# Altium PCB Board.PcbDoc
Units mil, origin at the board's own origin, x right, y up, seen from the top; angles counter-clockwise.
Board outline 6000 x 4000 mil, 2 copper layers (Top Layer, Bottom Layer); 2 components, 2 nets, 291 pads, 0 vias.
Unrouted connection lines stored in the file: 2.
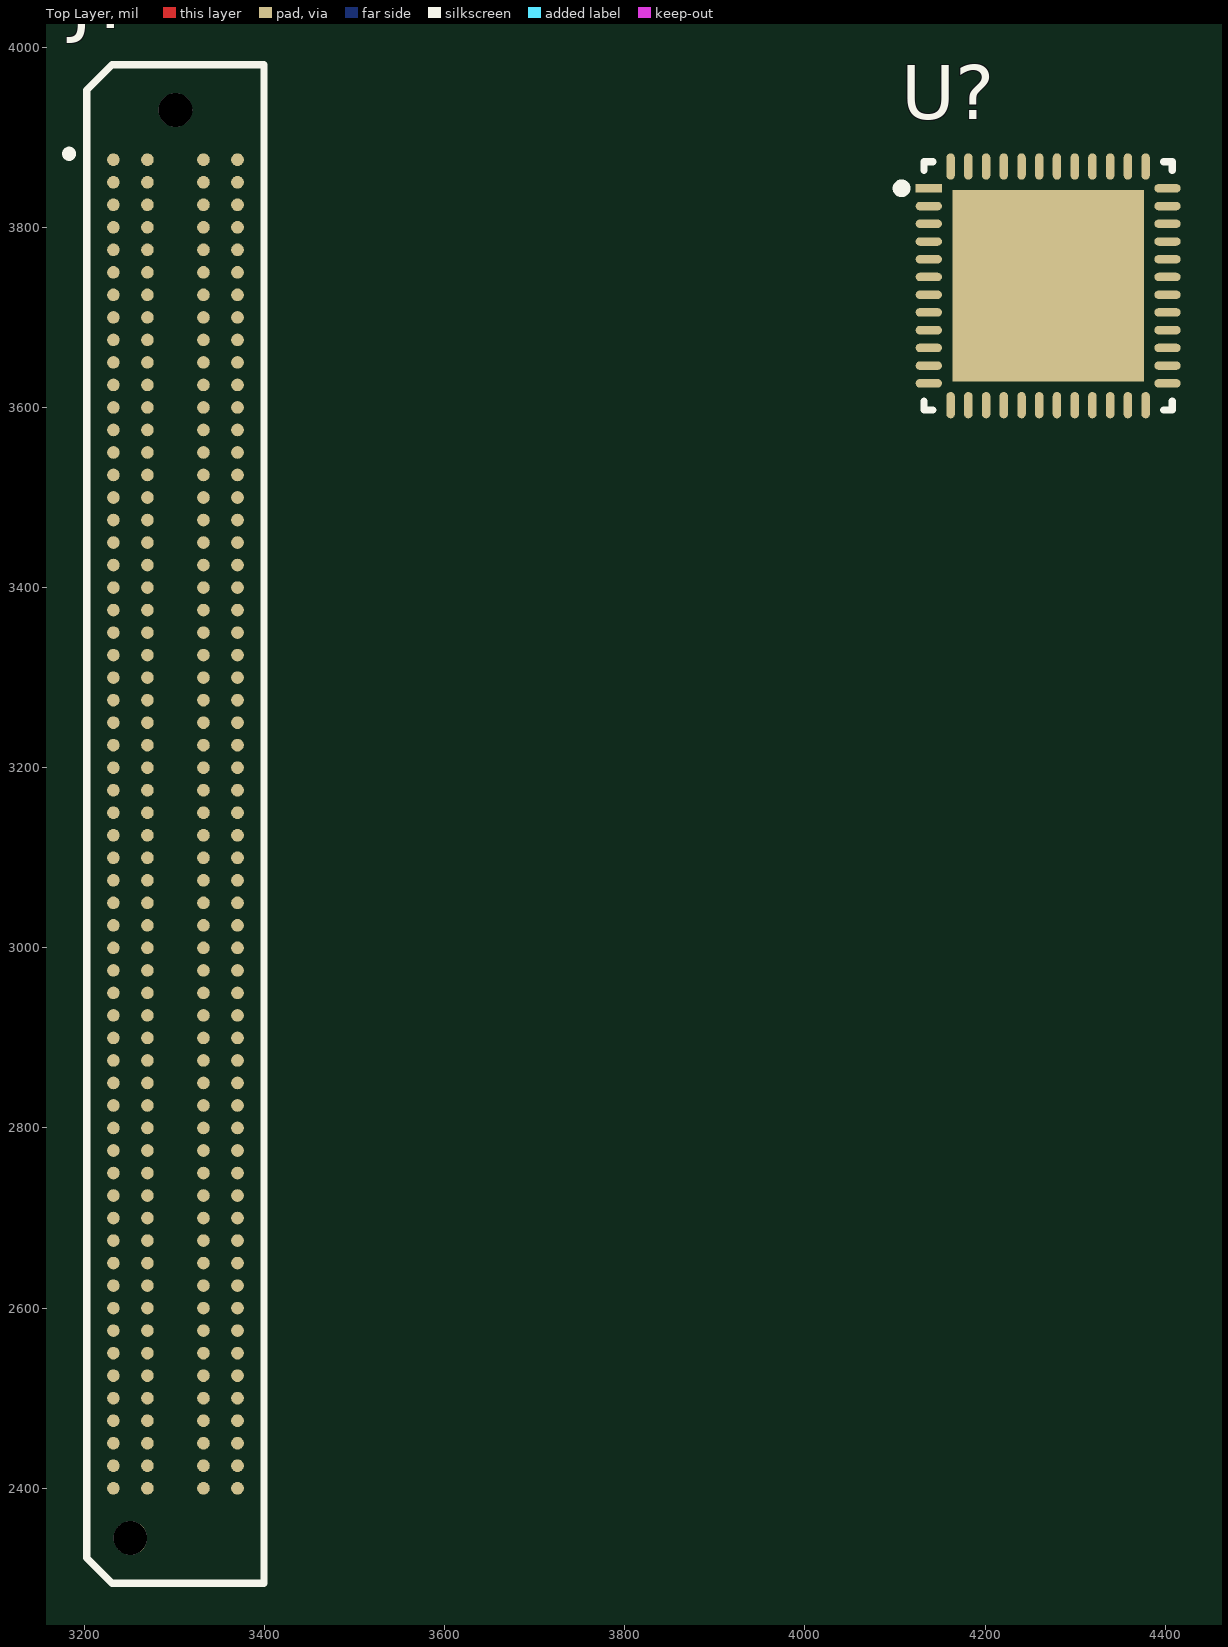
[diagram p0: Top Layer view]
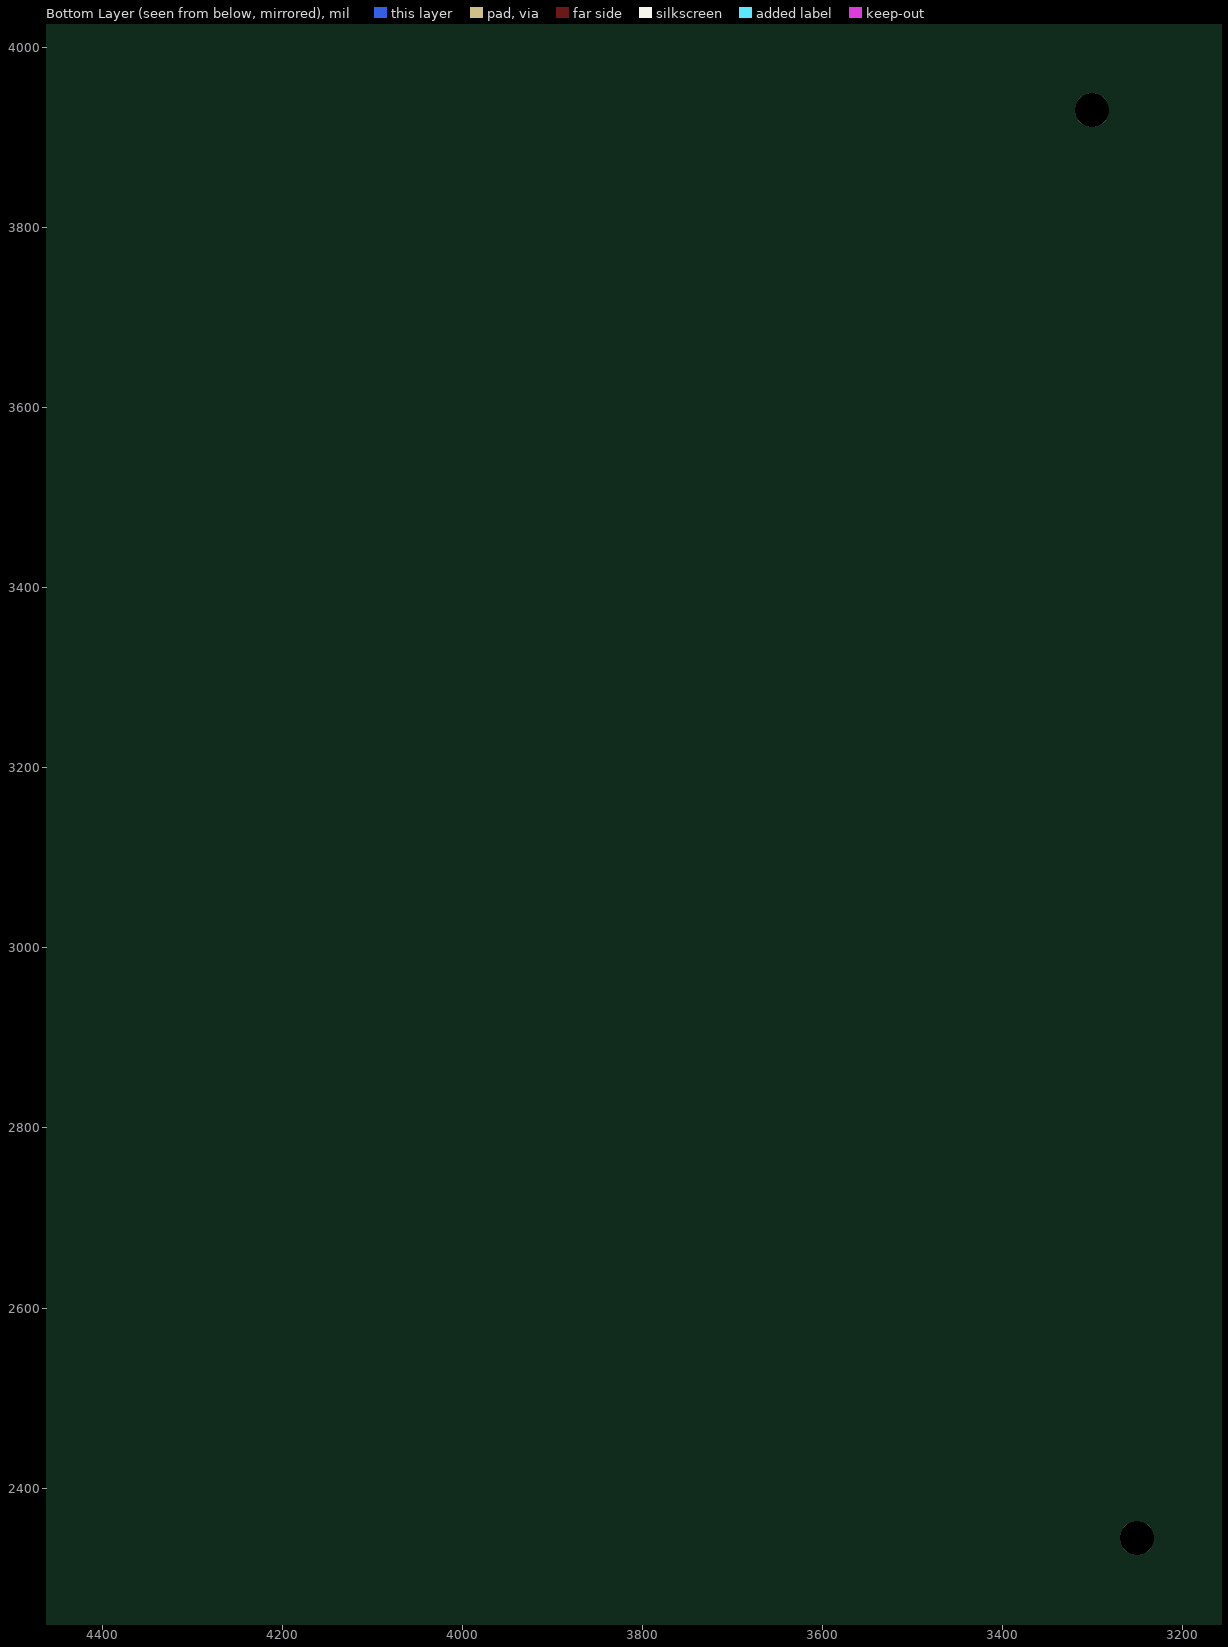
[diagram p1: Bottom Layer view, seen from below]

## Layer stack, top to bottom
Top Solder: solder mask 0.4, Solder Resist, Dk 3.5
Top Layer: signal copper 1.4
Dielectric 1: dielectric 12.6, FR-4, Dk 4.8
Bottom Layer: signal copper 1.4
Bottom Solder: solder mask 0.4, Solder Resist, Dk 3.5

## Board outline
1000,1000 7000,1000 7000,5000 1000,5000

## Design rules (kind name [scope] priority, off if disabled: settings)
Clearance [All] p1: gap=10 ignorepadtopadclearanceinfootprint=FALSE except(0: Arc-Hole Track-Hole SMDPad-Hole THPad-Hole Via-Hole Fill-Hole Poly-Hole Region-Hole Text-Hole)
PolygonConnect [All] p1: connectstyle=Relief reliefconductorwidth=10 reliefentries=4 polygonreliefangle="90 Angle" airgapwidth=10
RoomDefinition Board [InComponentClass('Board')] p1: confinementstyle=ConfineIn formatcopy=TRUE lockcomponents=FALSE outline 5415,1265 6040,1265 6040,3085 5415,3085
RoutingVias [All] p1: holewidth=28 width=50 viastyle="Through Hole" minholewidth=28 minwidth=50 maxholewidth=28 maxwidth=50
SolderMaskExpansion [All] p1: expansion=4 istentingtop=FALSE
Width [All] p1: maxlimit=10 minlimit=10 preferedwidth=10
30 further rules are at their usual default settings.

## Components (designator, comment, footprint, x,y, rotation, side; value= is the part's Value field where it differs from the comment)
J? "ADM6-60-01.5-L-4-2-A-TR" SAMTEC_ADM6-60-01.5-L-4-2-A-TR 3301.1,3137.5 r90 top
U? "HMCAD1511" FP-HMCAD1511-IPC_C 4270,3735 r0 top

## Footprints (in the part's own frame and the unit in brackets; to place one, negate y for a bottom-side part, rotate by r counter-clockwise, add the part's x,y. Pads: shape width x height; smd on the part's side, far side on the other; paste and mask are expansions set on the pad)
FP-HMCAD1511-IPC_C [mm]
  rect 0.74x0.239 smd paste+0 mask+0: 1(-3.365,2.75)
  rrect100% 0.74x0.239 smd paste+0 mask+0: 2(-3.365,2.25) 3(-3.365,1.75) 4(-3.365,1.25) 5(-3.365,0.75) 6(-3.365,0.25) 7(-3.365,-0.25) 8(-3.365,-0.75) 9(-3.365,-1.25) 10(-3.365,-1.75) 11(-3.365,-2.25) 12(-3.365,-2.75) 25(3.365,-2.75) 26(3.365,-2.25) 27(3.365,-1.75) 28(3.365,-1.25) 29(3.365,-0.75) 30(3.365,-0.25) 31(3.365,0.25) 32(3.365,0.75) 33(3.365,1.25) 34(3.365,1.75) 35(3.365,2.25) 36(3.365,2.75)
  rrect100% 0.239x0.74 smd paste+0 mask+0: 13(-2.75,-3.365) 14(-2.25,-3.365) 15(-1.75,-3.365) 16(-1.25,-3.365) 17(-0.75,-3.365) 18(-0.25,-3.365) 19(0.25,-3.365) 20(0.75,-3.365) 21(1.25,-3.365) 22(1.75,-3.365) 23(2.25,-3.365) 24(2.75,-3.365) 37(2.75,3.365) 38(2.25,3.365) 39(1.75,3.365) 40(1.25,3.365) 41(0.75,3.365) 42(0.25,3.365) 43(-0.25,3.365) 44(-0.75,3.365) 45(-1.25,3.365) 46(-1.75,3.365) 47(-2.25,3.365) 48(-2.75,3.365)
  rect 5.4x5.4 smd paste-1000 mask+0: 49(0,0)
  silkscreen extent -4.26,-3.5 3.5,3.5, body extent -3.84,-3.84 3.84,3.84, height 0.25
SAMTEC_ADM6-60-01.5-L-4-2-A-TR [mm]
  round 0.356 smd: A01(18.732,1.75) A02(18.098,1.75) A03(17.462,1.75) A04(16.828,1.75) A05(16.192,1.75) A06(15.557,1.75) A07(14.922,1.75) A08(14.287,1.75) A09(13.652,1.75) A10(13.018,1.75) A11(12.383,1.75) A12(11.747,1.75) A13(11.112,1.75) A14(10.477,1.75) A15(9.842,1.75) A16(9.207,1.75) A17(8.572,1.75) A18(7.938,1.75) A19(7.302,1.75) A20(6.667,1.75) A21(6.032,1.75) A22(5.397,1.75) A23(4.763,1.75) A24(4.127,1.75) A25(3.492,1.75) A26(2.857,1.75) A27(2.222,1.75) A28(1.587,1.75) A29(0.952,1.75) A30(0.317,1.75) A31(-0.318,1.75) A32(-0.953,1.75) A33(-1.588,1.75) A34(-2.222,1.75) A35(-2.857,1.75) A36(-3.492,1.75) A37(-4.127,1.75) A38(-4.763,1.75) A39(-5.397,1.75) A40(-6.032,1.75) A41(-6.667,1.75) A42(-7.302,1.75) A43(-7.938,1.75) A44(-8.572,1.75) A45(-9.207,1.75) A46(-9.842,1.75) A47(-10.477,1.75) A48(-11.112,1.75) A49(-11.747,1.75) A50(-12.383,1.75) A51(-13.018,1.75) A52(-13.652,1.75) A53(-14.287,1.75) A54(-14.922,1.75) A55(-15.557,1.75) A56(-16.192,1.75) A57(-16.828,1.75) A58(-17.462,1.75) A59(-18.098,1.75) A60(-18.732,1.75) B01(18.732,0.79) B02(18.098,0.79) B03(17.462,0.79) B04(16.828,0.79) B05(16.192,0.79) B06(15.557,0.79) B07(14.922,0.79) B08(14.287,0.79) B09(13.652,0.79) B10(13.018,0.79) B11(12.383,0.79) B12(11.747,0.79) B13(11.112,0.79) B14(10.477,0.79) B15(9.842,0.79) B16(9.207,0.79) B17(8.572,0.79) B18(7.938,0.79) B19(7.302,0.79) B20(6.667,0.79) B21(6.032,0.79) B22(5.397,0.79) B23(4.763,0.79) B24(4.127,0.79) B25(3.492,0.79) B26(2.857,0.79) B27(2.222,0.79) B28(1.587,0.79) B29(0.953,0.79) B30(0.317,0.79) B31(-0.318,0.79) B32(-0.953,0.79) B33(-1.587,0.79) B34(-2.222,0.79) B35(-2.857,0.79) B36(-3.492,0.79) B37(-4.127,0.79) B38(-4.763,0.79) B39(-5.397,0.79) B40(-6.032,0.79) B41(-6.667,0.79) B42(-7.302,0.79) B43(-7.938,0.79) B44(-8.572,0.79) B45(-9.207,0.79) B46(-9.842,0.79) B47(-10.477,0.79) B48(-11.112,0.79) B49(-11.747,0.79) B50(-12.383,0.79) B51(-13.018,0.79) B52(-13.652,0.79) B53(-14.287,0.79) B54(-14.922,0.79) B55(-15.557,0.79) B56(-16.192,0.79) B57(-16.828,0.79) B58(-17.462,0.79) B59(-18.098,0.79) B60(-18.732,0.79) C01(18.732,-0.79) C02(18.098,-0.79) C03(17.462,-0.79) C04(16.828,-0.79) C05(16.192,-0.79) C06(15.557,-0.79) C07(14.922,-0.79) C08(14.287,-0.79) C09(13.652,-0.79) C10(13.018,-0.79) C11(12.383,-0.79) C12(11.747,-0.79) C13(11.112,-0.79) C14(10.477,-0.79) C15(9.842,-0.79) C16(9.207,-0.79) C17(8.572,-0.79) C18(7.938,-0.79) C19(7.302,-0.79) C20(6.667,-0.79) C21(6.032,-0.79) C22(5.397,-0.79) C23(4.763,-0.79) C24(4.127,-0.79) C25(3.492,-0.79) C26(2.857,-0.79) C27(2.222,-0.79) C28(1.587,-0.79) C29(0.953,-0.79) C30(0.318,-0.79) C31(-0.317,-0.79) C32(-0.953,-0.79) C33(-1.587,-0.79) C34(-2.222,-0.79) C35(-2.857,-0.79) C36(-3.492,-0.79) C37(-4.127,-0.79) C38(-4.763,-0.79) C39(-5.397,-0.79) C40(-6.032,-0.79) C41(-6.667,-0.79) C42(-7.302,-0.79) C43(-7.938,-0.79) C44(-8.572,-0.79) C45(-9.207,-0.79) C46(-9.842,-0.79) C47(-10.477,-0.79) C48(-11.112,-0.79) C49(-11.747,-0.79) C50(-12.383,-0.79) C51(-13.018,-0.79) C52(-13.652,-0.79) C53(-14.287,-0.79) C54(-14.922,-0.79) C55(-15.557,-0.79) C56(-16.192,-0.79) C57(-16.828,-0.79) C58(-17.462,-0.79) C59(-18.098,-0.79) C60(-18.732,-0.79) D01(18.732,-1.75) D02(18.098,-1.75) D03(17.462,-1.75) D04(16.828,-1.75) D05(16.192,-1.75) D06(15.557,-1.75) D07(14.922,-1.75) D08(14.287,-1.75) D09(13.652,-1.75) D10(13.018,-1.75) D11(12.383,-1.75) D12(11.747,-1.75) D13(11.112,-1.75) D14(10.477,-1.75) D15(9.842,-1.75) D16(9.207,-1.75) D17(8.572,-1.75) D18(7.938,-1.75) D19(7.302,-1.75) D20(6.667,-1.75) D21(6.032,-1.75) D22(5.397,-1.75) D23(4.763,-1.75) D24(4.127,-1.75) D25(3.492,-1.75) D26(2.857,-1.75) D27(2.222,-1.75) D28(1.588,-1.75) D29(0.953,-1.75) D30(0.318,-1.75) D31(-0.317,-1.75) D32(-0.952,-1.75) D33(-1.587,-1.75) D34(-2.222,-1.75) D35(-2.857,-1.75) D36(-3.492,-1.75) D37(-4.127,-1.75) D38(-4.763,-1.75) D39(-5.397,-1.75) D40(-6.032,-1.75) D41(-6.667,-1.75) D42(-7.302,-1.75) D43(-7.938,-1.75) D44(-8.572,-1.75) D45(-9.207,-1.75) D46(-9.842,-1.75) D47(-10.477,-1.75) D48(-11.112,-1.75) D49(-11.747,-1.75) D50(-12.383,-1.75) D51(-13.018,-1.75) D52(-13.652,-1.75) D53(-14.287,-1.75) D54(-14.922,-1.75) D55(-15.557,-1.75) D56(-16.192,-1.75) D57(-16.828,-1.75) D58(-17.462,-1.75) D59(-18.098,-1.75) D60(-18.732,-1.75)
  round 0.95 hole 0.95 unplated: ""(-20.135,1.27) ""(20.135,0)
  silkscreen extent -21.41,-2.5 21.41,3.1

## Part data
J?: "0.635 mm AcceleRate HD High-Density 4-Row Header", Package=None, Availability=Unavailable, MP=ADM6-60-01.5-L-4-2-A-TR, Price=None
U?: library part CMP-09081-000016-1, "IC ADC 8BIT PIPELINED 48QFN", Case/Package=QFN, Max Operating Temperature=85°C, Max Supply Voltage=2V, Min Operating Temperature=-40°C, Min Supply Voltage=1.7V, Operating Supply Voltage=1.8V, Package Quantity=500, Power Dissipation=710mW, Contact Plating=Tin, Differential Nonlinearity=0.2LSB, Integral Nonlinearity (INL)=0.5LSB, Interface=LVDS, Lead Free="Contains Lead", Mount="Surface Mount", Number of A/D Converters=4, Number of Analog Inputs=4, Number of Bits=8, Number of Inputs=4, Number of Pins=48, Packaging="Cut Strip", Polarity=Bipolar, REACH SVHC="No SVHC", Resolution=8b, Sampling Rate=1GS/s, Supply Type=Analog

## Nets (pads, with @x,y where several pads share a name; then routed paths per layer and width w, separated by ;. In a path a pad name is that pad's centre, name@x,y a point inside that pad or via, vN(x,y) a via of type N, cw(c..) or ccw(c..) an arc to the next point about the centre after c; other vN are vias at no path point)
NetJ?_A01: J?.A01 U?.21
NetJ?_A03: J?.A03 U?.22
pads on no net: J?. J?.A02 J?.A04 J?.A05 J?.A06 J?.A07 J?.A08 J?.A09 J?.A10 J?.A11 J?.A12 J?.A13 J?.A14 J?.A15 J?.A16 J?.A17 J?.A18 J?.A19 J?.A20 J?.A21 J?.A22 J?.A23 J?.A24 J?.A25 J?.A26 J?.A27 J?.A28 J?.A29 J?.A30 J?.A31 J?.A32 J?.A33 J?.A34 J?.A35 J?.A36 J?.A37 J?.A38 J?.A39 J?.A40 J?.A41 J?.A42 J?.A43 J?.A44 J?.A45 J?.A46 J?.A47 J?.A48 J?.A49 J?.A50 J?.A51 J?.A52 J?.A53 J?.A54 J?.A55 J?.A56 J?.A57 J?.A58 J?.A59 J?.A60 J?.B01 J?.B02 J?.B03 J?.B04 J?.B05 J?.B06 J?.B07 J?.B08 J?.B09 J?.B10 J?.B11 J?.B12 J?.B13 J?.B14 J?.B15 J?.B16 J?.B17 J?.B18 J?.B19 J?.B20 J?.B21 J?.B22 J?.B23 J?.B24 J?.B25 J?.B26 J?.B27 J?.B28 J?.B29 J?.B30 J?.B31 J?.B32 J?.B33 J?.B34 J?.B35 J?.B36 J?.B37 J?.B38 J?.B39 J?.B40 J?.B41 J?.B42 J?.B43 J?.B44 J?.B45 J?.B46 J?.B47 J?.B48 J?.B49 J?.B50 J?.B51 J?.B52 J?.B53 J?.B54 J?.B55 J?.B56 J?.B57 J?.B58 J?.B59 J?.B60 J?.C01 J?.C02 J?.C03 J?.C04 J?.C05 J?.C06 J?.C07 J?.C08 J?.C09 J?.C10 J?.C11 J?.C12 J?.C13 J?.C14 J?.C15 J?.C16 J?.C17 J?.C18 J?.C19 J?.C20 J?.C21 J?.C22 J?.C23 J?.C24 J?.C25 J?.C26 J?.C27 J?.C28 J?.C29 J?.C30 J?.C31 J?.C32 J?.C33 J?.C34 J?.C35 J?.C36 J?.C37 J?.C38 J?.C39 J?.C40 J?.C41 J?.C42 J?.C43 J?.C44 J?.C45 J?.C46 J?.C47 J?.C48 J?.C49 J?.C50 J?.C51 J?.C52 J?.C53 J?.C54 J?.C55 J?.C56 J?.C57 J?.C58 J?.C59 J?.C60 J?.D01 J?.D02 J?.D03 J?.D04 J?.D05 J?.D06 J?.D07 J?.D08 J?.D09 J?.D10 J?.D11 J?.D12 J?.D13 J?.D14 J?.D15 J?.D16 J?.D17 J?.D18 J?.D19 J?.D20 J?.D21 J?.D22 J?.D23 J?.D24 J?.D25 J?.D26 J?.D27 J?.D28 J?.D29 J?.D30 J?.D31 J?.D32 J?.D33 J?.D34 J?.D35 J?.D36 J?.D37 J?.D38 J?.D39 J?.D40 J?.D41 J?.D42 J?.D43 J?.D44 J?.D45 J?.D46 J?.D47 J?.D48 J?.D49 J?.D50 J?.D51 J?.D52 J?.D53 J?.D54 J?.D55 J?.D56 J?.D57 J?.D58 J?.D59 J?.D60 U?.1 U?.2 U?.3 U?.4 U?.5 U?.6 U?.7 U?.8 U?.9 U?.10 U?.11 U?.12 U?.13 U?.14 U?.15 U?.16 U?.17 U?.18 U?.19 U?.20 U?.23 U?.24 U?.25 U?.26 U?.27 U?.28 U?.29 U?.30 U?.31 U?.32 U?.33 U?.34 U?.35 U?.36 U?.37 U?.38 U?.39 U?.40 U?.41 U?.42 U?.43 U?.44 U?.45 U?.46 U?.47 U?.48 U?.49